# Altium PCB PCB1.PcbDoc
Units mil, origin at the board's own origin, x right, y up, seen from the top; angles counter-clockwise.
Board outline 2749.34 x 1435 mil, 2 copper layers (Top Layer, Bottom Layer); 17 components, 25 nets, 84 pads, 0 vias.
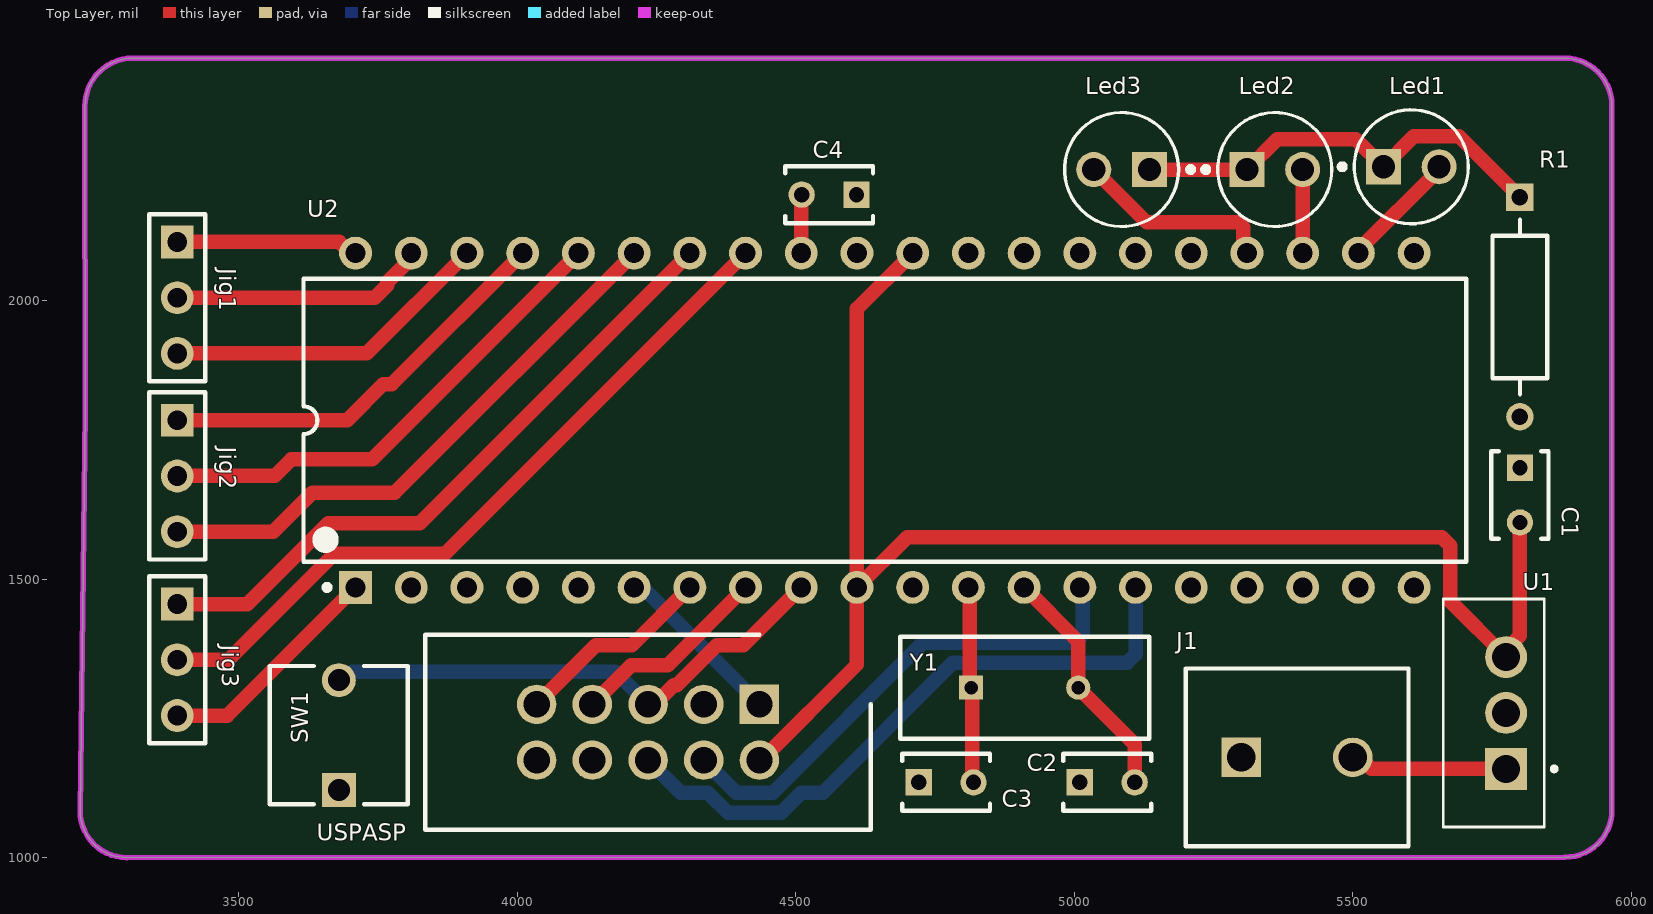
[diagram p0: Top Layer view]
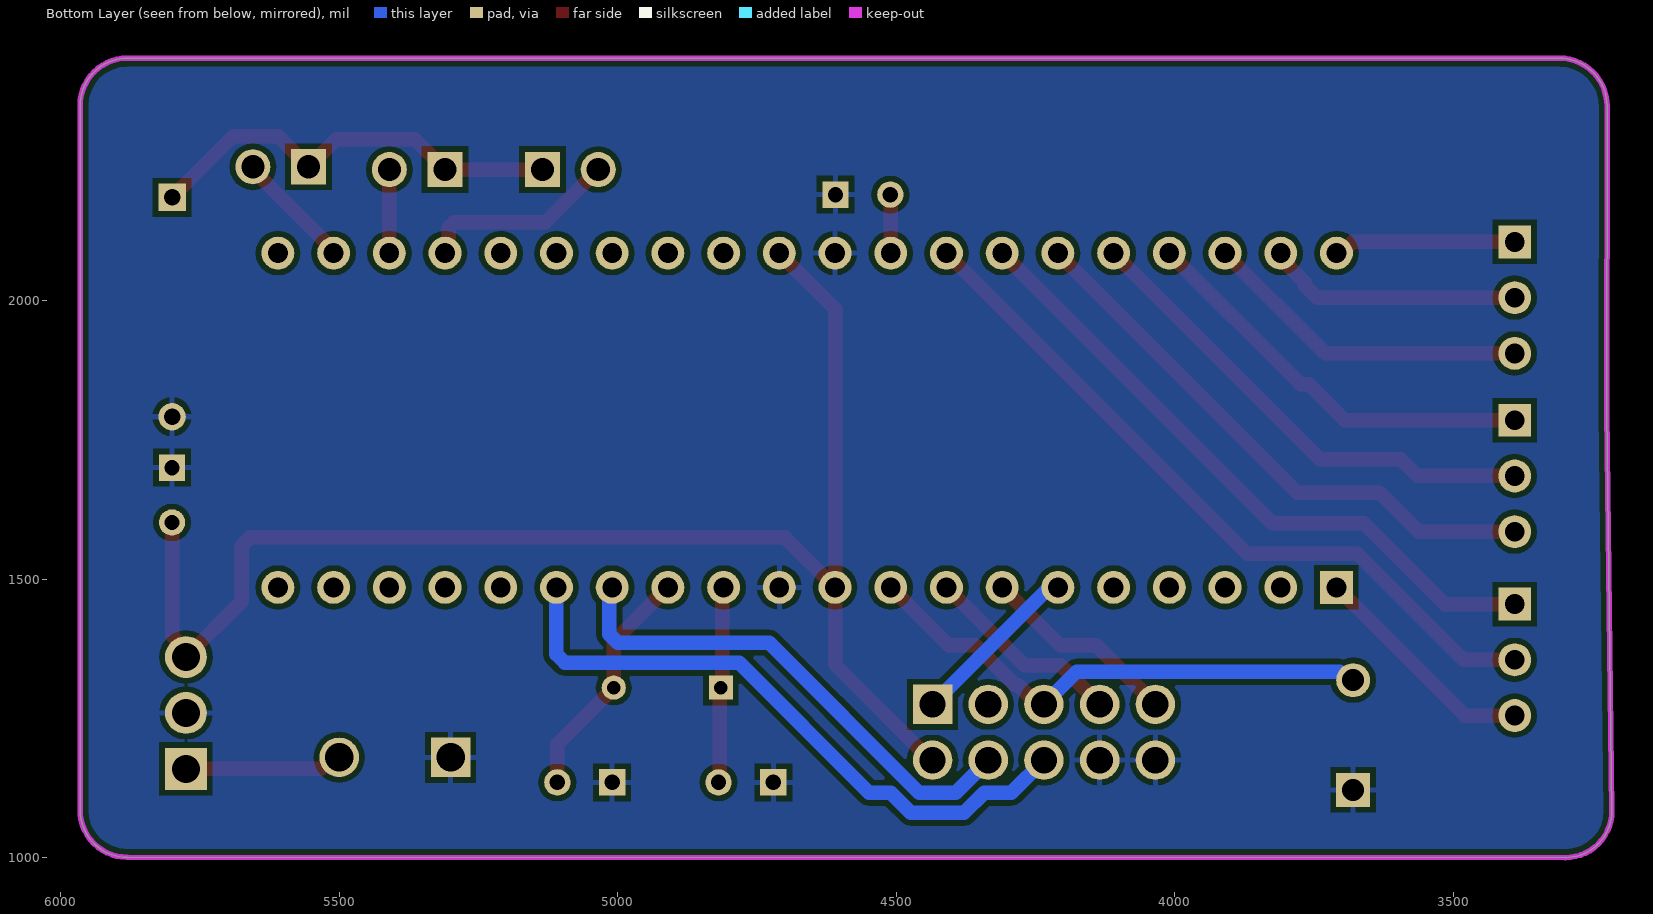
[diagram p1: Bottom Layer view, seen from below]
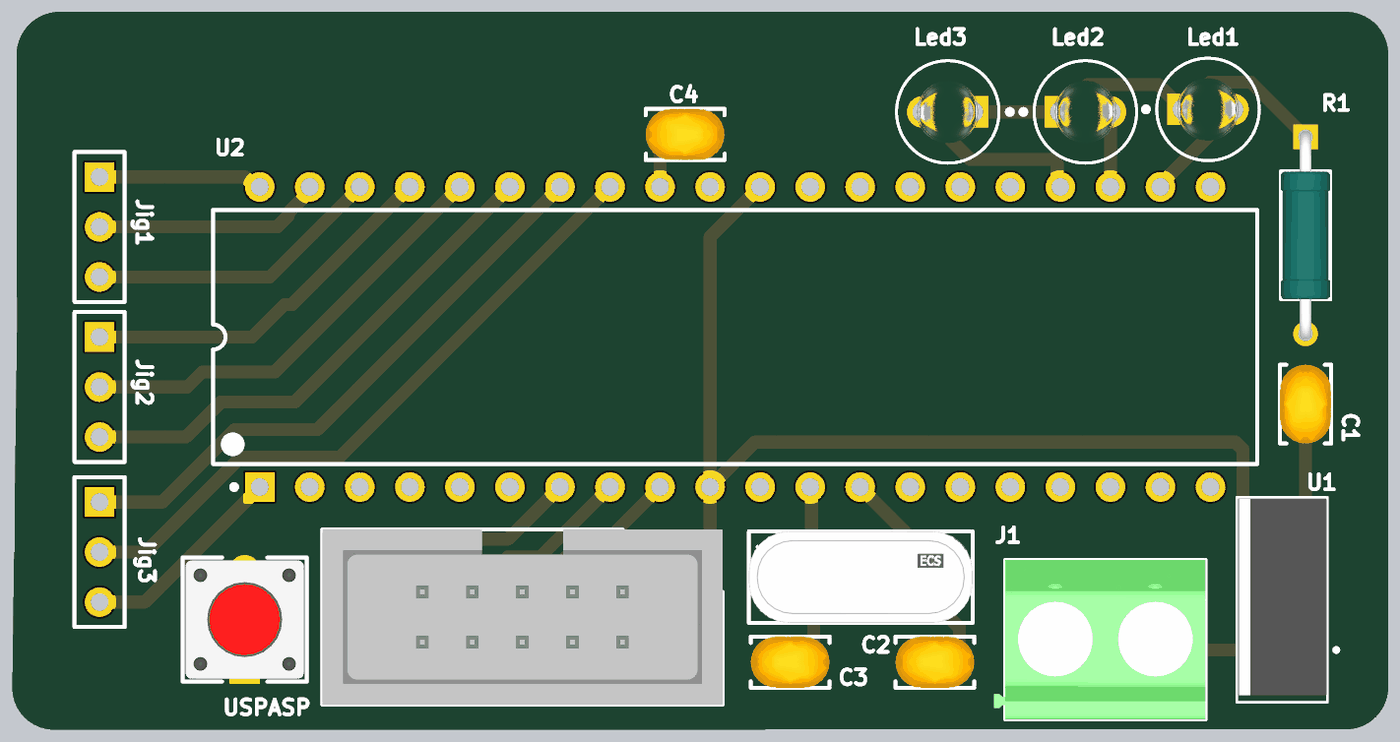
[diagram p2: 3D render of the assembled board from above, using the file's embedded part models]

## Layer stack, top to bottom
Top Solder: solder mask 0.4, Solder Resist, Dk 3.5
Top Layer: signal copper 1.4
Dielectric 1: dielectric 12.6, FR-4, Dk 4.8
Bottom Layer: signal copper 1.4
Bottom Solder: solder mask 0.4, Solder Resist, Dk 3.5

## Board outline
3215.66,1083.6 ccw(c3299.26,1083.6) 3299.26,1000 5880.78,1000.66 ccw(c5880.78,1084.88) 5965,1084.88 5965,2350 ccw(c5880,2350) 5880,2435 3310.25,2435 ccw(c3310.25,2349.01) 3224.25,2349.01 3225,1800

## Design rules (kind name [scope] priority, off if disabled: settings)
Clearance [All] p1: gap=10 ignorepadtopadclearanceinfootprint=FALSE
PolygonConnect [All] p1: connectstyle=Relief reliefconductorwidth=10 reliefentries=4 polygonreliefangle="90 Angle" airgapwidth=10
RoutingVias [All] p1: holewidth=28 width=50 viastyle="Through Hole" minholewidth=28 minwidth=50 maxholewidth=28 maxwidth=50
SilkToSilkClearance [All] p1: silktosilkclearance=4
SolderMaskExpansion [All] p1: expansion=4 istentingtop=FALSE
Width [All] p1: maxlimit=26 minlimit=16 preferedwidth=26 minimp=50.000000 maximp=50.000000 favimp=50.000000
29 further rules are at their usual default settings.

## Components (designator, comment, footprint, x,y, rotation, side; value= is the part's Value field where it differs from the comment)
C1 "K103K15X7RF5TL2" FP-K155L2-MFG 5800,1650.79 r270 top
C2 "K103K15X7RF5TL2" FP-K155L2-MFG 5059.21,1135 r0 top
C3 "K103K15X7RF5TL2" FP-K155L2-MFG 4770,1135 r0 top
C4 "K103K15X7RF5TL2" FP-K155L2-MFG 4560,2190 r180 top
J1 "1729128" PHOE-1729128-2_V 5400,1180 r0 top
Jig1 "Header 3" HDR1X3 3390,2105 r270 top
Jig2 "Header 3" HDR1X3 3390,1785 r270 top
Jig3 "Header 3" HDR1X3 3390,1455 r270 top
Led1 "TLLG4401" FP-6_544-5255_01-4-MFG 5605,2240 r0 top
Led2 "TLLG4401" FP-6_544-5255_01-4-MFG 5360,2235 r0 top
Led3 "TLLG4401" FP-6_544-5255_01-4-MFG 5085,2235 r180 top
R1 "MRS25000C1001FCT00" FP-MRS25-MFG 5800,1988.15 r270 top
SW1 "EVQ-21505R" FP-EVQ-21505R-MFG 3680,1220 r90 top
U1 "L7805CV" TO255P1040X460X1968-3 5775,1159.21 r90 top
U2 "ATmega32A-PU" 40P6 4660,1785 r90 top
USPASP "USBASP Connector" SHDR10W99P254_2X5_2032X889X927P 4435,1275 r180 top
Y1 "ECS-80-20-4X" FP-ECS-80-20-4X-MFG 4911.06,1305 r0 top

## Footprints (in the part's own frame and the unit in brackets; to place one, negate y for a bottom-side part, rotate by r counter-clockwise, add the part's x,y. Pads: shape width x height; smd on the part's side, far side on the other; paste and mask are expansions set on the pad)
40P6 [mm] "40-Pin Ceramic Dual In-Line Package (CerDIP)"
  rect 1.5x1.5 hole 0.9: 1(-7.62,24.13)
  round 1.5 hole 0.9: 2(-7.62,21.59) 3(-7.62,19.05) 4(-7.62,16.51) 5(-7.62,13.97) 6(-7.62,11.43) 7(-7.62,8.89) 8(-7.62,6.35) 9(-7.62,3.81) 10(-7.62,1.27) 11(-7.62,-1.27) 12(-7.62,-3.81) 13(-7.62,-6.35) 14(-7.62,-8.89) 15(-7.62,-11.43) 16(-7.62,-13.97) 17(-7.62,-16.51) 18(-7.62,-19.05) 19(-7.62,-21.59) 20(-7.62,-24.13) 21(7.62,-24.13) 22(7.62,-21.59) 23(7.62,-19.05) 24(7.62,-16.51) 25(7.62,-13.97) 26(7.62,-11.43) 27(7.62,-8.89) 28(7.62,-6.35) 29(7.62,-3.81) 30(7.62,-1.27) 31(7.62,1.27) 32(7.62,3.81) 33(7.62,6.35) 34(7.62,8.89) 35(7.62,11.43) 36(7.62,13.97) 37(7.62,16.51) 38(7.62,19.05) 39(7.62,21.59) 40(7.62,24.13)
  silkscreen extent -7.74,-26.5 6.45,26.5, body extent -7.05,-26.47 7.05,26.47, height 5.72
FP-6_544-5255_01-4-MFG [mm]
  rect 1.6x1.6 hole 1.05 paste-2539.97 mask+0: 1(-1.27,0)
  round 1.6 hole 1.05 paste-2539.97 mask+0: 2(1.27,0)
  silkscreen extent -3.27,-2.6 2.6,2.6, body extent -2.32,-2.32 2.32,2.32, height 0.25
FP-ECS-80-20-4X-MFG [mm]
  rect 1.1x1.1 hole 0.6 paste-2539.97 mask+0: 1(-2.44,0)
  round 1.1 hole 0.6 paste-2539.97 mask+0: 2(2.44,0)
  silkscreen extent -5.68,-2.32 5.68,2.32, body extent -5.77,-2.42 5.77,2.42, height 0.25
FP-EVQ-21505R-MFG [mm]
  rect 1.55x1.55 hole 1 paste-2539.97 mask+0: A(-2.5,0)
  round 1.55 hole 1 paste-2539.97 mask+0: B(2.5,0)
  silkscreen extent -3.15,-3.15 3.15,3.15, body extent -3.37,-3.25 3.37,3.25, height 0.25
FP-K155L2-MFG [mm]
  rect 1.2x1.2 hole 0.7 paste-2539.97 mask+0: 1(-1.25,0)
  round 1.2 hole 0.7 paste-2539.97 mask+0: 2(1.25,0)
  silkscreen extent -2,-1.3 2,1.3, body extent -2.1,-1.4 2.1,1.4, height 0.25
FP-MRS25-MFG [mm]
  rect 1.25x1.25 hole 0.75 paste-2539.97 mask+0: 1(-5,0)
  round 1.25 hole 0.75 paste-2539.97 mask+0: 2(5,0)
  silkscreen extent -3.98,-1.25 3.98,1.25, body extent -5.72,-1.35 5.72,1.35, height 0.25
HDR1X3 [mm] "Connector; Header; 3 Position"
  rect 1.5x1.5 hole 0.9: 1(0,0)
  round 1.5 hole 0.9: 2(2.54,0) 3(5.08,0)
  silkscreen extent -1.27,-1.27 6.35,1.27
PHOE-1729128-2_V [mm] "Receptacle, 2-Leads, Body 8.1x10.16mm, Pitch 5.08mm"
  rect 1.8x1.8 hole 1.3: 1(-2.54,0)
  round 1.8 hole 1.3: 2(2.54,0)
  silkscreen extent -5.08,-4.05 5.08,4.05, body extent -5.65,-4.05 5.08,4.05, height 10.01
SHDR10W99P254_2X5_2032X889X927P [mm]
  rect 1.8x1.8 hole 1.2: 1(0,0)
  round 1.8 hole 1.2: 2(0,2.54) 3(2.54,0) 4(2.54,2.54) 5(5.08,0) 6(5.08,2.54) 7(7.62,0) 8(7.62,2.54) 9(10.16,0) 10(10.16,2.54)
  silkscreen extent -5.08,-3.17 15.24,5.72, body extent -5.08,-3.18 15.24,5.72, height 9.27
TO255P1040X460X1968-3 [mm]
  rect 1.91x1.91 / inner round 1.91 / far side rect 1.91x1.91 hole 1.27: 1(0,0)
  round 1.91 hole 1.27: 2(2.55,0) 3(5.1,0)
  silkscreen extent -2.65,-2.29 7.75,2.86, body extent -2.29,-1.71 7.68,2.73, height 19.68

## Part data
C1 C4: library part CMP-00030-39474934-1, "K103K15X7RF5TL2 Multilayer Ceramic Capacitor, 0.01 uF, 50 V, ± 10%, X7R, Radial Leaded", Capacitance=10nF, Case/Package=Dipped, Dielectric=X7R, Dielectric Material=Ceramic, Max Operating Temperature=125°C, Min Operating Temperature=-55°C, Tolerance=10%, Voltage=50V, Depth=2.6mm, Diameter=500µm, Height=4mm, Height - Seated (Max)=5.588mm, Lead Diameter=500µm, Lead Free="Lead Free", Lead Length=30mm, Lead Pitch=2.5mm, Lead/Base Style=Straight, Length=4mm, Mount="PCB, Through Hole", NexarPartId=39474934, Number of Pins=2, Packaging="Cut Tape", Radiation Hardening=No, REACH SVHC=Unknown, RoHS=Compliant, Schedule B=8532240060, Termination=Radial, Thickness=2.6mm, Voltage Rating=50V, Voltage Rating (DC)=50V, Weight=160.004709mg, Width=2.5mm
C2 C3: library part CMP-00030-39474934-1, "K103K15X7RF5TL2 Multilayer Ceramic Capacitor, 0.01 uF, 50 V, ± 10%, X7R, Radial Leaded (10P)", Capacitance=10nF, Case/Package=Dipped, Dielectric=X7R, Dielectric Material=Ceramic, Max Operating Temperature=125°C, Min Operating Temperature=-55°C, Tolerance=10%, Voltage=50V, Depth=2.6mm, Diameter=500µm, Height=4mm, Height - Seated (Max)=5.588mm, Lead Diameter=500µm, Lead Free="Lead Free", Lead Length=30mm, Lead Pitch=2.5mm, Lead/Base Style=Straight, Length=4mm, Mount="PCB, Through Hole", NexarPartId=39474934, Number of Pins=2, Packaging="Cut Tape", Radiation Hardening=No, REACH SVHC=Unknown, RoHS=Compliant, Schedule B=8532240060, Termination=Radial, Thickness=2.6mm, Voltage Rating=50V, Voltage Rating (DC)=50V, Weight=160.004709mg, Width=2.5mm
J1: library part CMP-2000-05815-1, "Header of  Input Batt", Current Rating=13500mA, Manufacturer="Phoenix Contact", Package Description="2-Pin Through Hole Device, Body 8.1 x 10.16 mm, Pitch 5.08 mm", Package Reference=1729128-2, Package Version=03/2015, Voltage Rating=400V, Datasheet URL=https://datasheet.ciiva.com/16046/1729128-16046181.pdf, Datasheet Version=12/2013, Manufacturer URL=http://www.phoenixcontact.com/, Mounting Technology=ThroughHole, No. of Positions=2, No. of Rows=1, Orientation=Horizontal, Package URL=https://www.phoenixcontact.com/online/portal/pi/pxc/product_detail_page/!ut/p/b1/3VdJjqNKFDxLH8AFycySyWY2ozFsEPOMMQaDOX1XedGL_1Vdm5YXJleknhSKeBkvI6EA8ncAo3AYoDhBQGco6KN7VURTdemj9us_IEKEZo_YHiPAEWEFmDGOHMORkqKYCORBZxgL7ZoaZYcbFFUZ3fqxSY6GOuxydWUuHqz1ynmMFygu583Bob0Ewr6Sd_l-5m-kAueHiB0jpRwZwe58wwtkpxtMYd_LmGcDRU02dRNEyWt6Y2ti5pSyJ_reIkzIulrqApdnbT11V5jnCKbYNCvhEM1MCpPByat_X379-iThf08CI5GfOPqfBeS3BRoBOdD55AKVv0iLwCMq-2BrzXWSGRH7pUGD9uwXQjiph3xL0DKQwdGa0JImiIOmBNOestqgwTHSSs2oOep-78apyXQBvNi8ZLaFjvjWvcaUEBu0MC6Wbe-d6mB0FAebo2lUWinqYaZs5DAYzV0RP9yitUjnGJ0iI9xhZkT42OCQNUJJhkgWINNQLP2JFP6OpMg3JCVg70jqHT0lvKOnhHf0lPuOnnLf0VPuWx6_dxwUIvwk5WMkT0kLL1mh61l2yZVSzG3pYV_bqo-mj6uMKwKwdnnW8Jh5RTOJzMOA5c-eJDaZQw4mTMPH02PvS_ZAqNVjVTo2WyYLkwH_KU1mmmG5kjRhDqPXLwwVHvVOjCM60-fpXvTDfMGW1PVFVS1r4e4yVDk4ZdNbkUHvqPqQSeian4UD39fNKmachqdJ1NJbyk8rXT9mXTvPk3oE5meulKGgiruPJek-4I9hTT6G8ZLOyRSm2RRVbThERQad5OS28hdt4YW4vG0stgYYzsWsK4_7y6DZMjJSCqri1kyiZR5vD7pwIrNR7QwPHTcLTI5qT7eRlpHrdGiupYlqQDJ7zy_CND8fWWBoLRXxk1RVcXiBQwbTD4Xi7KL-FuO94t9xaqweXzH, Packing=Bulk, PartNumber=1729128, Pitch=5.08mm, RoHS=TRUE
Jig1 Jig2 Jig3: "Header, 3-Pin", LatestRevisionDate=17-Jul-2002, LatestRevisionNote="Re-released for DXP Platform.", Publisher="Altium Limited"
Led1 Led2 Led3: library part CMP-00030-39390728-1, "TLLG4401 LED, Green, 2mcd, 3mmDia., T-1, +/-25deg, 565nm, 7mA, 1.9V Vf, 20V Vr, 20mW, -40", Ambient Temperature Range High=100°C, Case/Package=Radial, Color=Green, Forward Current=2mA, Forward Voltage=1.9V, Min Operating Temperature=-40°C, Power Dissipation=20mW, Reverse Voltage=6V, Voltage Rating (DC)=2.4V, Depth=3.2mm, Dominant Wavelength=575nm, Height=4.5mm, Illumination Color=Green, Lead Free="Lead Free", Lead Length=23mm, Length=3.2mm, Lens Color=Green, Lens Style="Circular, Colored, Diffused, Dome, Round, Tinted", Lens Transparency=Diffused, Luminous Intensity=2mcd, Max Junction Temperature (Tj)=100°C, Max Operating Temperature=100°C, Mount="Through Hole", NexarPartId=39390728, Number of Elements=1, Number of LEDs=1, Number of Pins=2, Packaging=Bulk, Peak Wavelength=565nm, Radiation Hardening=No, REACH SVHC=Unknown, RoHS=Compliant, Schedule B="8541402000, 8541402000", Test Current=2mA, Viewing Angle=25°, Wavelength=575nm
R1: library part CMP-02408-000051-1, "RES 1K OHM 0.6W 1% for all leds", Case/Package=Axial, Max Operating Temperature=155°C, Max Power Dissipation=600mW, Min Operating Temperature=-55°C, Package Quantity=5000, Resistance=1kR, Resistance Tolerance=1%, Resistor Type="Metal Film", Temperature Coefficient=50ppm/°C, Voltage Rating=350V, Construction=Cylindrical, Contact Plating=Tin, Diameter=2.5mm, Lead Diameter=0.6mm, Lead Free="Lead Free", Length=6.5mm, Military Standard=Not, Mount="Through Hole", Number of Pins=2, Number of Terminations=2, Packaging="Tape and Reel", Power Rating=600mW, Radiation Hardening=No, RoHS Compliant=Yes, Series=MRS25, Technology="THIN FILM", Termination=Axial, Tolerance=1%, Voltage Rating (DC)=350V, Weight=0.00776oz, Width=2.5mm
SW1: library part CMP-05618-000118-1, "Switch for reset circuits", Actuator Color=Red, Case/Package=Radial, Contact Current Rating=20mA, Contact Resistance=50mR, Max Operating Temperature=70°C, Max Voltage Rating (DC)=15V, Min Operating Temperature=-20°C, Operating Force=1.6N, Package Quantity=1, Actuator Length=1.6mm, Actuator Type=Standard, Contact Plating=Silver, Current Rating=20mA, Depth=6mm, Electrical Life=100000Cycles, Height=5mm, Illumination Type=Non-Illuminated, Lead Free="Lead Free", Length=6mm, Max Current Rating=20mA, Mechanical Life=100000Cycles, Mount="Through Hole", Orientation=Straight, Packaging="Tape and Reel", Series=EVQ2, Size=6mm, Switch Function=Off-Mom, Switch Travel=0.25mm, Termination="PC Pin", Throw Configuration=SPST, Voltage Rating (DC)=15V, Width=6mm
U1: "Linear Voltage Regulator IC Positive Fixed 1 Output 1.5A TO-220", Package="TO-220-3 ON Semiconductor", Availability="In Stock", Check_prices=https://www.snapeda.com/parts/L7805CV/STMicroelectronics/view-part/?ref=eda, MF=STMicroelectronics, MP=L7805CV, Price=None, Purchase-URL=https://pricing.snapeda.com/search/part/L7805CV/?ref=eda, SnapEDA_Link=https://www.snapeda.com/parts/L7805CV/STMicroelectronics/view-part/?ref=snap
U2: library part CMP-0095-00028-2, "8-bit AVR Microcontroller, 2.7-5.5V, 16MHz, 32KB Flash, 1KB EEPROM, 2KB SRAM, 40-pin PDIP, Industrial Grade (-40°C to 85°C)", Code_JEDEC=MS-011-AC, ComponentLink1Description="Manufacturer URL", ComponentLink1URL=http://www.atmel.com/, ComponentLink2Description="ATmega32A Datasheet", ComponentLink2URL=http://www.atmel.com/dyn/resources/prod_documents/doc8155.pdf, ComponentLink3Description="ATmega32A Summary", ComponentLink3URL=http://www.atmel.com/dyn/resources/prod_documents/8155S.pdf, DatasheetVersion="revC, Feb-2011", PackageDescription="40-lead (0.600\"/15.24mm Wide) Plastic Dual Inline Package (PDIP)", PackageReference=40P6, PackageVersion="revB, Sep-2001", RevisionNote="DatasheetVersion updated. URLs added."
USPASP: "Connector", Manufacturer_Name=Molex, Manufacturer_Part_Number=70246-1001, Mouser Part Number=538-70246-1001, Datasheet Link=http://www.molex.com/pdm_docs/sd/702461001_sd.pdf, Height=9.27mm, Mouser Price/Stock=https://www.mouser.co.uk/ProductDetail/Molex/70246-1001?qs=L7RdmAxh%252BcP9d7Ope9dnAA%3D%3D
Y1: library part CMP-1669-00002-3, ESR (Equivalent Series Resistance)=80Ω, Frequency=8MHz, Frequency Stability=50ppm, Frequency Tolerance=0.003%, Load Capacitance=20pF, Max Operating Temperature=70°C, Min Operating Temperature=-10°C, Height=3.5mm, Lead Free="Lead Free", Length=11.3538mm, Mount="Through Hole", NexarPartId=316504, Number of Pins=49, Packaging=Bulk, RoHS=Compliant, Schedule B="8541600025, 8541600025", Termination=Radial, Tolerance=0.003%, Width=4.65mm

## Nets (pads, with @x,y where several pads share a name; then routed paths per layer and width w, separated by ;. In a path a pad name is that pad's centre, name@x,y a point inside that pad or via, vN(x,y) a via of type N, cw(c..) or ccw(c..) an arc to the next point about the centre after c; other vN are vias at no path point)
GND: C1.1 C2.1 C3.1 C4.1 J1.1 R1.2 SW1.A U1.2 U2.11 U2.31 USPASP.8 USPASP.10
Jig1_off: Jig1.3 U2.38 | length 594.6
  Top Layer w26: Jig1.3 3730,1905 U2.38
Jig1_on: Jig1.1 U2.40 | length 328.3
  Top Layer w26: Jig1.1 3681.06,2105 3701.06,2085 U2.40
Jig1_res: Jig1.2 U2.39 | length 461.8
  Top Layer w26: Jig1.2 3744.77,2005 3766.91,2027.14 3766.91,2032.96 3810,2076.06 U2.39
Jig2_off: Jig2.3 U2.35 | length 1027.1
  Top Layer w26: Jig2.3 3561.97,1585 3631.97,1655 3780,1655 U2.35
Jig2_on: Jig2.1 U2.37 | length 744.3
  Top Layer w26: Jig2.1 3695,1785 3760,1850 3775,1850 U2.37
Jig2_res: Jig2.2 U2.36 | length 885.7
  Top Layer w26: Jig2.2 3565,1685 3595,1715 3740,1715 U2.36
Jig3_off: Jig3.3 U2.1 | length 415.3
  Top Layer w26: Jig3.3 3480,1255 U2.1
Jig3_on: Jig3.1 U2.34 | length 1181
  Top Layer w26: Jig3.1 3515.76,1455 3660.76,1600 3825,1600 U2.34
Jig3_res: Jig3.2 U2.33 | length 1322.4
  Top Layer w26: Jig3.2 3481.97,1355 3671.97,1545 3870,1545 U2.33
MISO: U2.7 USPASP.9 | length 362
  Top Layer w26: USPASP.9 4141.13,1381.13 4206.13,1381.13 U2.7
MOSI: U2.6 USPASP.1 | length 312
  Bottom Layer w26: U2.6 4216.32,1478.68 4231.32,1478.68 USPASP.1
NetC4_2: C4.2 U2.32 | length 105.3
  Top Layer w26: U2.32 4510.39,2085.39 4510.39,2189.61 C4.2
NetJ1_2: J1.2 U1.1 | length 283.6
  Top Layer w26: J1.2 5512.14,1180 5532.93,1159.21 U1.1
NetLed1_1: Led1.1 Led2.1 Led3.1 R1.1 | length 776
  Top Layer w26: Led3.1 Led2.1 5364.5,2289.5 5505.5,2289.5 Led1.1 5609.5,2294.5 5690.5,2294.5 R1.1
RESET: SW1.B U2.9 USPASP.5 | length 947.4
  Top Layer w26: USPASP.5 4247.14,1275 4281.27,1309.13 4286.49,1309.13 4358.49,1381.13 4406.13,1381.13 U2.9
  Bottom Layer w26: SW1.B 3689.48,1318.43 3704.49,1333.43 4176.57,1333.43 USPASP.5
RX: U2.14 USPASP.4 | length 908.2
  Bottom Layer w26: USPASP.4 4393.43,1116.57 4459.2,1116.57 4728.29,1385.65 4999.77,1385.65 5015,1400.88 5015,1480 U2.14
SCK: U2.8 USPASP.7 | length 362
  Top Layer w26: USPASP.7 4205.13,1345.13 4270.13,1345.13 U2.8
SEL1: Led1.2 U2.22 | length 215.1
  Top Layer w26: U2.22 5510,2090 5655,2235 Led1.2
SEL2: Led2.2 U2.23 | length 150
  Top Layer w26: U2.23 Led2.2
SEL3: Led3.2 U2.24 | length 360.4
  Top Layer w26: Led3.2 5130,2140 5294.77,2140 5303.68,2131.09 5303.68,2091.32 U2.24
TX: U2.15 USPASP.6 | length 1152
  Bottom Layer w26: USPASP.6 4293.43,1116.57 4342.52,1116.57 4378.52,1080.57 4474.12,1080.57 4510.12,1116.57 4549.05,1116.57 4782.14,1349.65 5094.77,1349.65 5110,1364.88 U2.15
VCC: C1.2 U1.3 U2.10 U2.30 USPASP.2 | length 2627.6
  Top Layer w26: USPASP.2 4438.39,1175 4610,1346.61 U2.10 ; U2.30 4610,1985 U2.10 ; C1.2 5800,1398.31 5775,1373.31 U1.3 5675,1460 5675,1559.77 5659.77,1575 4710,1575 4700,1575 U2.10
XTAL1: C2.2 U2.13 Y1.2 | length 432.2
  Top Layer w26: U2.13 5007.13,1387.87 Y1.2 5108.43,1203.7 C2.2
XTAL2: C3.2 U2.12 Y1.1 | length 353.8
  Top Layer w26: U2.12 4812.5,1482.5 4812.5,1307.5 Y1.1 4817.11,1302.89 4817.11,1137.11 C3.2
pads on no net: U2.2 U2.3 U2.4 U2.5 U2.16 U2.17 U2.18 U2.19 U2.20 U2.21 U2.25 U2.26 U2.27 U2.28 U2.29 USPASP.3

## Polygon pours and split planes (outlines as drawn)
GND on Bottom Layer "GND_L02_P000" (solid, pour order 0): 3215.66,1083.6 ccw(c3299.26,1083.6) 3299.26,1000 5880.78,1000.66 ccw(c5880.78,1084.88) 5965,1084.88 5965,2350 ccw(c5880,2350) 5880,2435 3310.25,2435 ccw(c3310.25,2349.01) 3224.25,2349.01 3225,1800

## Keep-outs
Keep-Out Layer:
  lines w10: 3215.66,1083.6 ccw(c3299.26,1083.6) 3299.26,1000 5880.78,1000.66 ccw(c5880.78,1084.88) 5965,1084.88 5965,2350 ccw(c5880,2350) 5880,2435 3455,2435 3310.25,2435 ccw(c3310.25,2349.01) 3224.25,2349.01 3225,1800 3215.66,1083.6